# Altium PCB PCB1.PcbDoc
Units mil, origin at the board's own origin, x right, y up, seen from the top; angles counter-clockwise.
Board outline 1800 x 750 mil, 2 copper layers (Top Layer, Bottom Layer); 5 components, 6 nets, 19 pads, 16 vias.
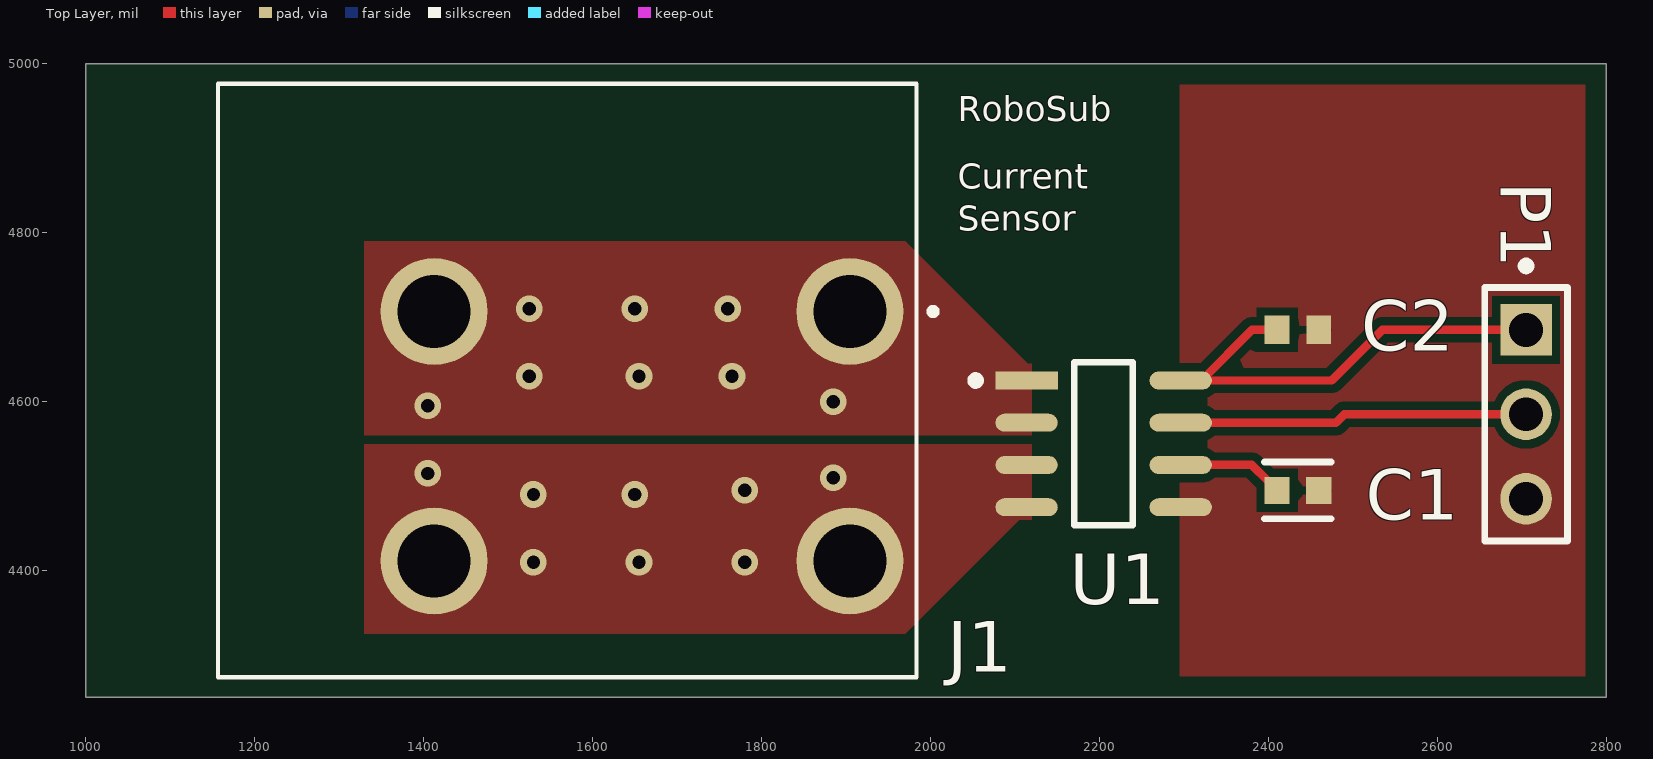
[diagram p0: Top Layer view]
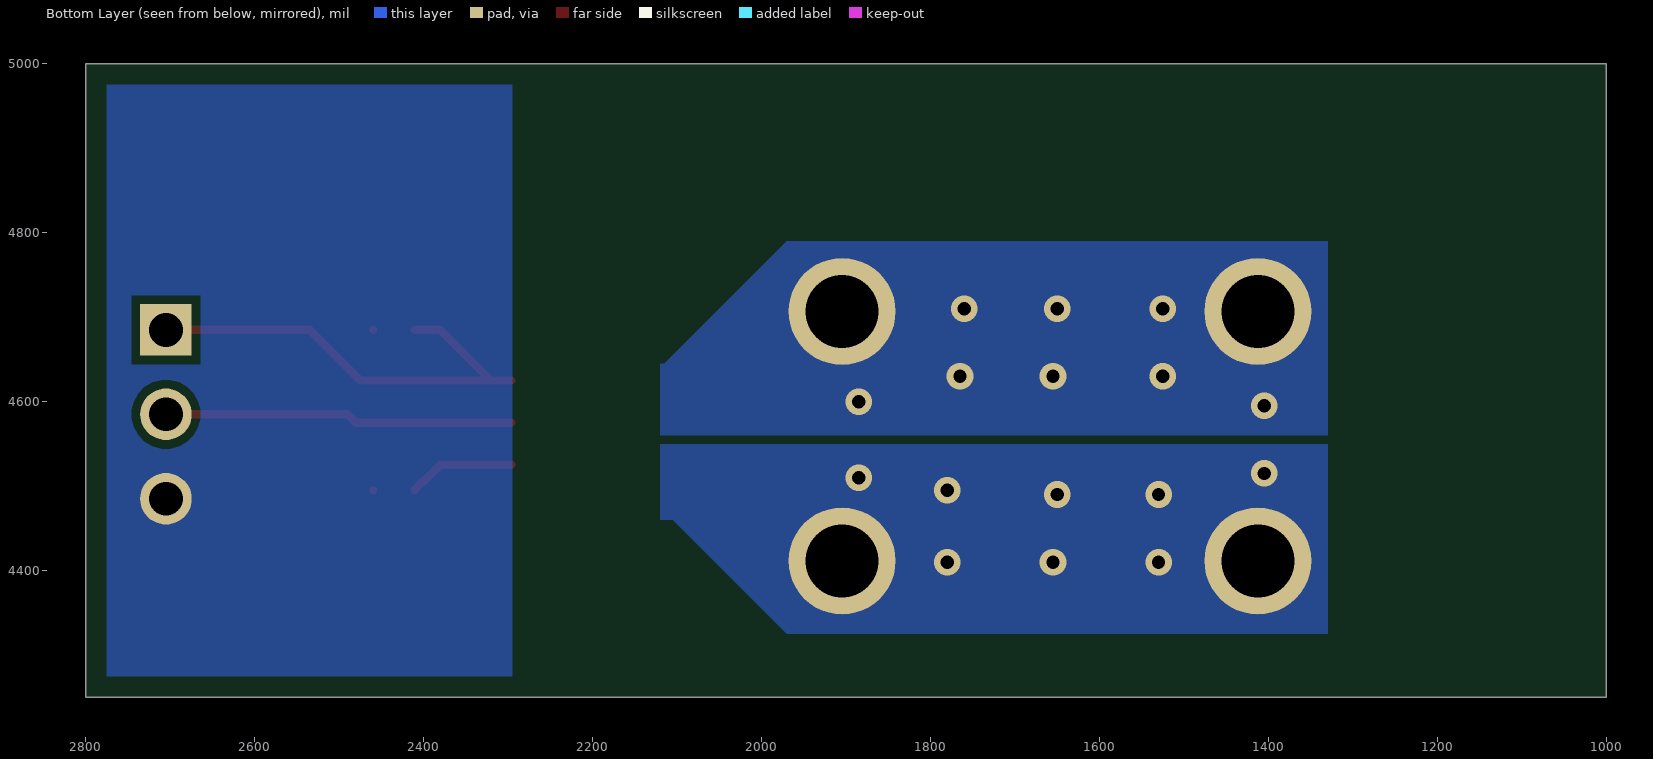
[diagram p1: Bottom Layer view, seen from below]
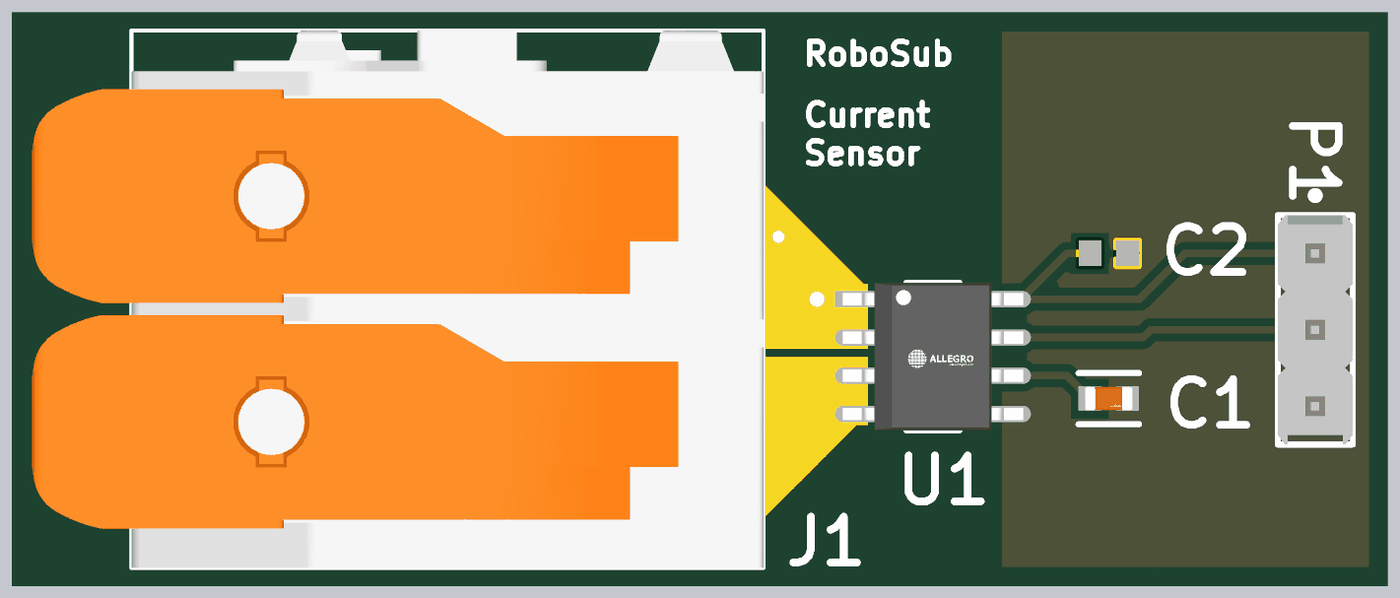
[diagram p2: 3D render of the assembled board from above, using the file's embedded part models]

## Layer stack, top to bottom
Top Solder: solder mask 0.4, Solder Resist, Dk 3.5
Top Layer: signal copper 1.4
Dielectric 1: dielectric 12.6, FR-4, Dk 4.8
Bottom Layer: signal copper 1.4
Bottom Solder: solder mask 0.4, Solder Resist, Dk 3.5

## Board outline
1000,4250 2800,4250 2800,5000 1000,5000

## Design rules (kind name [scope] priority, off if disabled: settings)
Clearance [All] p1: gap=10 ignorepadtopadclearanceinfootprint=FALSE
PolygonConnect [All] p1: connectstyle=Direct reliefconductorwidth=10 reliefentries=4 polygonreliefangle="90 Angle" airgapwidth=10
RoutingVias [All] p1: holewidth=28 width=50 viastyle="Through Hole" minholewidth=28 minwidth=50 maxholewidth=28 maxwidth=50
SolderMaskExpansion [All] p1: expansion=4 istentingtop=FALSE
SupplyNets "Schematic Supply Nets" [InNet('GND')] p1: voltage=0.000
Width [All] p1: maxlimit=10 minlimit=10 preferedwidth=10
30 further rules are at their usual default settings.

## Components (designator, comment, footprint, x,y, rotation, side; value= is the part's Value field where it differs from the comment)
C1 "GRM1885C1H102JA01D" FP-GRM188-0_1-e0_2_0_5-IPC_C 2435,4495 r0 top
C2 "GRM188R71E104KA01D" CAPC1608X90X35LL10T15 2435,4685 r180 top
J1 "2606-1102" WAGO_2606-1102 1505,4625 r270 top
P1 "22-28-4033" MOLX-22-28-4033_V 2705,4585 r270 top
U1 "ACS712ELCTR-30A-T" FP-LC-8-IPC_C 2205,4550 r0 top

## Footprints (in the part's own frame and the unit in brackets; to place one, negate y for a bottom-side part, rotate by r counter-clockwise, add the part's x,y. Pads: shape width x height; smd on the part's side, far side on the other; paste and mask are expansions set on the pad)
CAPC1608X90X35LL10T15 [mm] "Chip Capacitor, 2-Leads, Body 1.60x0.80mm, IPC High Density"
  rect 0.75x0.85 smd: 1(-0.625,0) 2(0.625,0)
  body extent -0.85,-0.45 0.85,0.45, height 0.9
FP-GRM188-0_1-e0_2_0_5-IPC_C [mil]
  rect 29.87x31.97 smd paste+0 mask+0: 1(-24.67,0) 2(24.67,0)
  silkscreen extent -40,-33 40,33, body extent -44,-22 44,22, height 10
FP-LC-8-IPC_C [mil]
  rect 73.78x21.34 smd paste+0 mask+0: 1(-91.18,75)
  rrect100% 73.78x21.34 smd paste+0 mask+0: 2(-91.18,25) 3(-91.18,-25) 4(-91.18,-75) 5(91.18,-75) 6(91.18,-25) 7(91.18,25) 8(91.18,75)
  silkscreen extent -156,-96 35,96, body extent -132,-100 132,100, height 10
MOLX-22-28-4033_V [mm] "THD, 3-Leads, Body 7.62x2.49mm, Pitch 2.54mm"
  rect 1.55x1.55 hole 1.02: 1(-2.54,0)
  round 1.55 hole 1.02: 2(0,0) 3(2.54,0)
  silkscreen extent -4.58,-1.24 3.81,1.24, body extent -3.81,-1.24 3.81,1.24, height 8.38
WAGO_2606-1102 [mm]
  round 3.216 hole 2.2: 1_1(-2.075,10.15) 1_2(-2.075,-2.35) 2_1(5.425,10.15) 2_2(5.425,-2.35)
  silkscreen extent -8.93,-8.85 8.93,12.75, body extent -8.93,-12.15 8.93,12.15, height 24

## Part data
C1: library part CMP-1662-00022-2, "Chip Multilayer Ceramic Capacitors for General Purpose, 0603, 1000pF, C0G, 30ppm/°C, 5%, 50V", Capacitance=1nF, Case Code (Imperial)=0603, Case Code (Metric)=1608, Dielectric=C0G, Dielectric Material=Ceramic, Insulation Resistance=10GR, Max Operating Temperature=125°C, Min Operating Temperature=-55°C, Package Quantity=1, Temperature Coefficient=30ppm/°C, Tolerance=5%, Voltage=50V, Case/Package=0603, Depth=0.8mm, Height=0.8mm, Lead Free="Lead Free", Length=1.6mm, Material=Ceramic, Mount="Surface Mount", Number of Pins=2, Packaging="Tape and Reel", Radiation Hardening=No, REACH SVHC="No SVHC", Termination=SMD/SMT, Thickness=0.035inch, Voltage Rating=50V, Voltage Rating (DC)=50V, Width=0.8mm
C2: library part CMP-2006-02868-1, Manufacturer=Murata, Part Number=GRM188R71E104KA01D
J1: "2 Position Wire to Board Terminal Block Horizontal with Board 0.295 (7.50mm) Through Hole", Package=None, Check_prices=https://www.snapeda.com/parts/2606-1102/WAGO/view-part/?ref=eda, MF=WAGO, MP=2606-1102, SnapEDA_Link=https://www.snapeda.com/parts/2606-1102/WAGO/view-part/?ref=snap
P1: library part CMP-1676-00001-5, "Male Header, Pitch 2.54 mm, 1 x 3 Position, Height 8.38 mm, Tail Length 3.18 mm, RoHS, Bulk", Colour=Black, Current Rating="4 A", Manufacturer=Molex, Max Operating Temperature="75 degC", Min Operating Temperature="0 degC", Package Quantity=1, Voltage Rating="250 V", ComponentLink1Description="Manufacturer URL", ComponentLink1URL=http://www.molex.com/, ComponentLink2Description=Datasheet, ComponentLink2URL=http://www.molex.com/pdm_docs/sd/022284033_sd.pdf, Contact Finish=Gold, Contact Material=Brass, Contact Plating=Gold, DatasheetVersion="Rev. G, 01/2012", Height="8.38 mm", Lead Pitch="0.1 inch", Length="7.62 mm", Mount="Through Hole", Mounting Technology="Through Hole", PackageDescription="Male Header, Pitch 2.54 mm, 1 x 3 Position, Height 8.38 mm, Tail Length 3.18 mm", PackageReference=22-28-4033, Packaging=Bulk, Pins=3, REACH SVHC=Unknown, RoHSCompliant=true, Rows=1
U1: library part CMP-2000-04990-2, "SENSOR CURRENT HALL 30A AC/DC", Case/Package=SOIC, Current Sensing=30A, Frequency=80kHz, Max Operating Temperature=85°C, Max Supply Current=13mA, Max Supply Voltage=5.5V, Min Operating Temperature=-40°C, Min Supply Voltage=4.5V, Operating Supply Voltage=5V, Output Current=10mA, Package Quantity=1, Accuracy=1.5%, Bandwidth=80kHz, Lead Free="Lead Free", Linearity=1.5%, Mount="Surface Mount", Number of Channels=1, Number of Pins=8, Packaging="Cut Tape", Polarity=Bidirectional, Quiescent Current=10mA, REACH SVHC="No SVHC", Response Time=5us, RoHS Compliant=Yes, Sensitivity=66mV/A, Series=-, Termination=SMD/SMT

## Via types
v1: diameter 31.5, hole 15.75, Top Layer to Bottom Layer, 16 vias

## Nets (pads, with @x,y where several pads share a name; then routed paths per layer and width w, separated by ;. In a path a pad name is that pad's centre, name@x,y a point inside that pad or via, vN(x,y) a via of type N, cw(c..) or ccw(c..) an arc to the next point about the centre after c; other vN are vias at no path point)
GND: C1.2 C2.1 P1.3 U1.5 | length 0.1
NetC1_1: C1.1 U1.6 | length 127.2
  Top Layer w10: U1.6 2380.33,4525 2399.34,4505.99 2400.39,4505.99 2410.33,4496.05 C1.1
NetC2_2: C2.2 P1.1 U1.8 | length 572.7
  Top Layer w10: C2.2 2380.63,4685 2320.63,4625 U1.8 2475,4625 2535,4685 P1.1
NetJ1_1_1: J1.1_1 J1.1_2 U1.1 U1.2
  other v1: 1405,4595 1885,4600 1525,4630 1655,4630 1765,4630 1525,4710 1650,4710 1760,4710
NetJ1_2_1: J1.2_1 J1.2_2 U1.3 U1.4
  other v1: 1530,4410 1655,4410 1780,4410 1530,4490 1650,4490 1780,4495 1885,4510 1405,4515
NetP1_2: P1.2 U1.7 | length 413
  Top Layer w10: U1.7 2480,4575 2490,4585 P1.2

## Polygon pours and split planes (outlines as drawn)
GND on Top Layer "GND_L01_P002" (solid, pour order 2): 2295,4275 2775,4275 2775,4975 2295,4975
NetJ1_2_1 on Top Layer "NETJ1_2_1_L01_P001" (solid, pour order 1): 1330,4325 1970,4325 2105,4460 2120,4460 2120,4550 1330,4550
NetJ1_1_1 on Top Layer "NETJ1_1_1_L01_P000" (solid, pour order 0): 1330,4790 1970,4790 2115,4645 2120,4645 2120,4560 1330,4560
NetJ1_2_1 on Bottom Layer "NETJ1_2_1_L02_P005" (solid, pour order 5): 1330,4550 2120,4550 2120,4460 2105,4460 1970,4325 1330,4325
NetJ1_1_1 on Bottom Layer "NETJ1_1_1_L02_P004" (solid, pour order 4): 1330,4790 1970,4790 2115,4645 2120,4645 2120,4560 1330,4560
GND on Bottom Layer "GND_L02_P003" (solid, pour order 3): 2295,4975 2775,4975 2775,4275 2295,4275

## Silkscreen, mask and mechanical layers (free items; w line width, h text height)
Top Overlay:
  text "RoboSub" at 2032,4932 h30
  text "Current" at 2032,4852 h30
  text "Sensor" at 2032,4802 h30
Top Solder:
  region: 1330,4550 2120,4550 2120,4460 2105,4460 1970,4325 1330,4325
  region: 1330,4790 1970,4790 2115,4645 2120,4645 2120,4560 1330,4560
Bottom Solder:
  region: 1330,4550 2120,4550 2120,4460 2105,4460 1970,4325 1330,4325
  region: 1330,4790 1970,4790 2115,4645 2120,4645 2120,4635 2150,4635 2150,4615 2120,4615 2120,4560 1330,4560